# Altium PCB G-BOX_V104a.PcbDoc
Units mil, origin at the board's own origin, x right, y up, seen from the top; angles counter-clockwise.
Board outline 1722.73 x 1998.51 mil, 2 copper layers (Top Layer, Bottom Layer); 76 components, 62 nets, 346 pads, 345 vias.
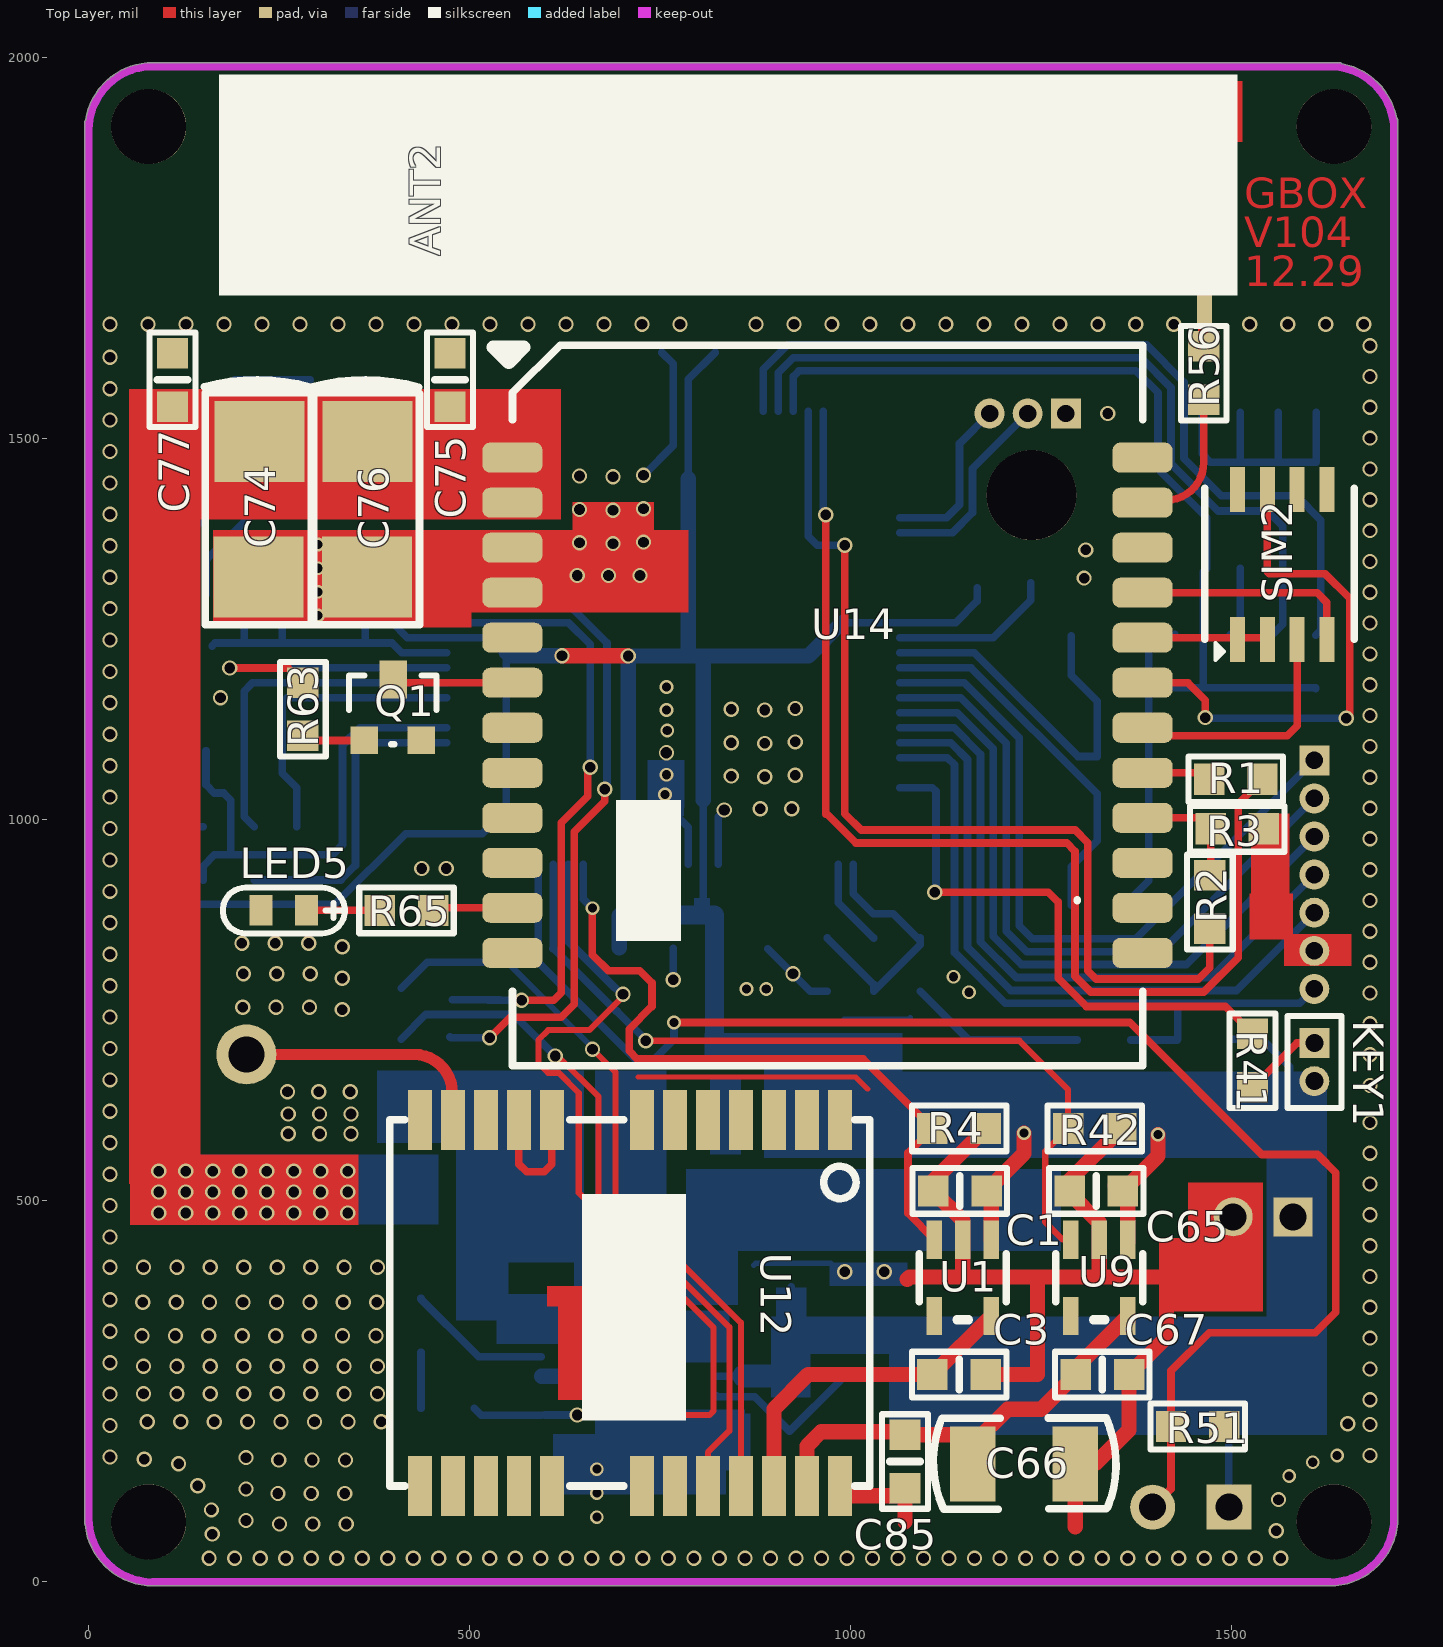
[diagram p0: Top Layer view]
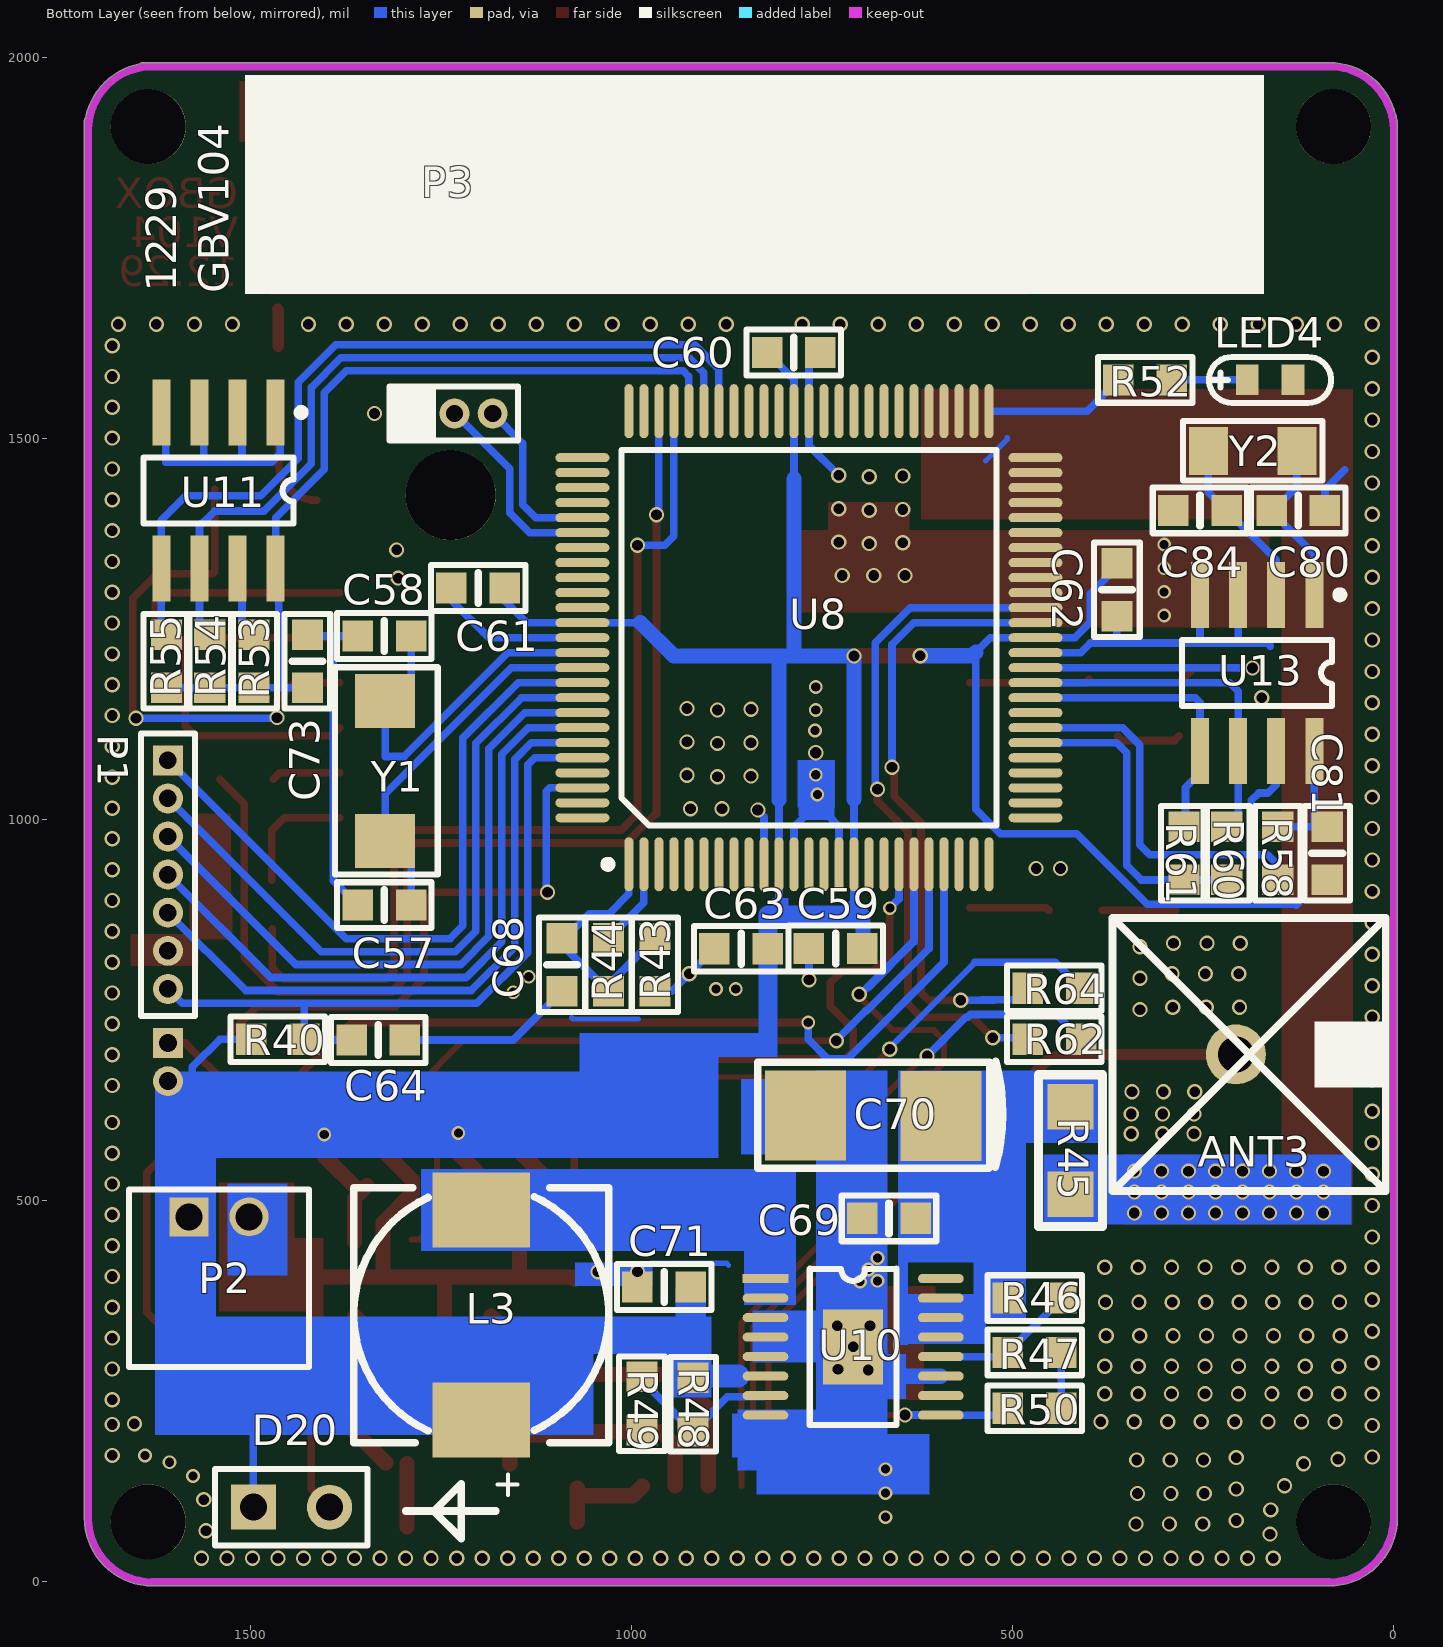
[diagram p1: Bottom Layer view, seen from below]
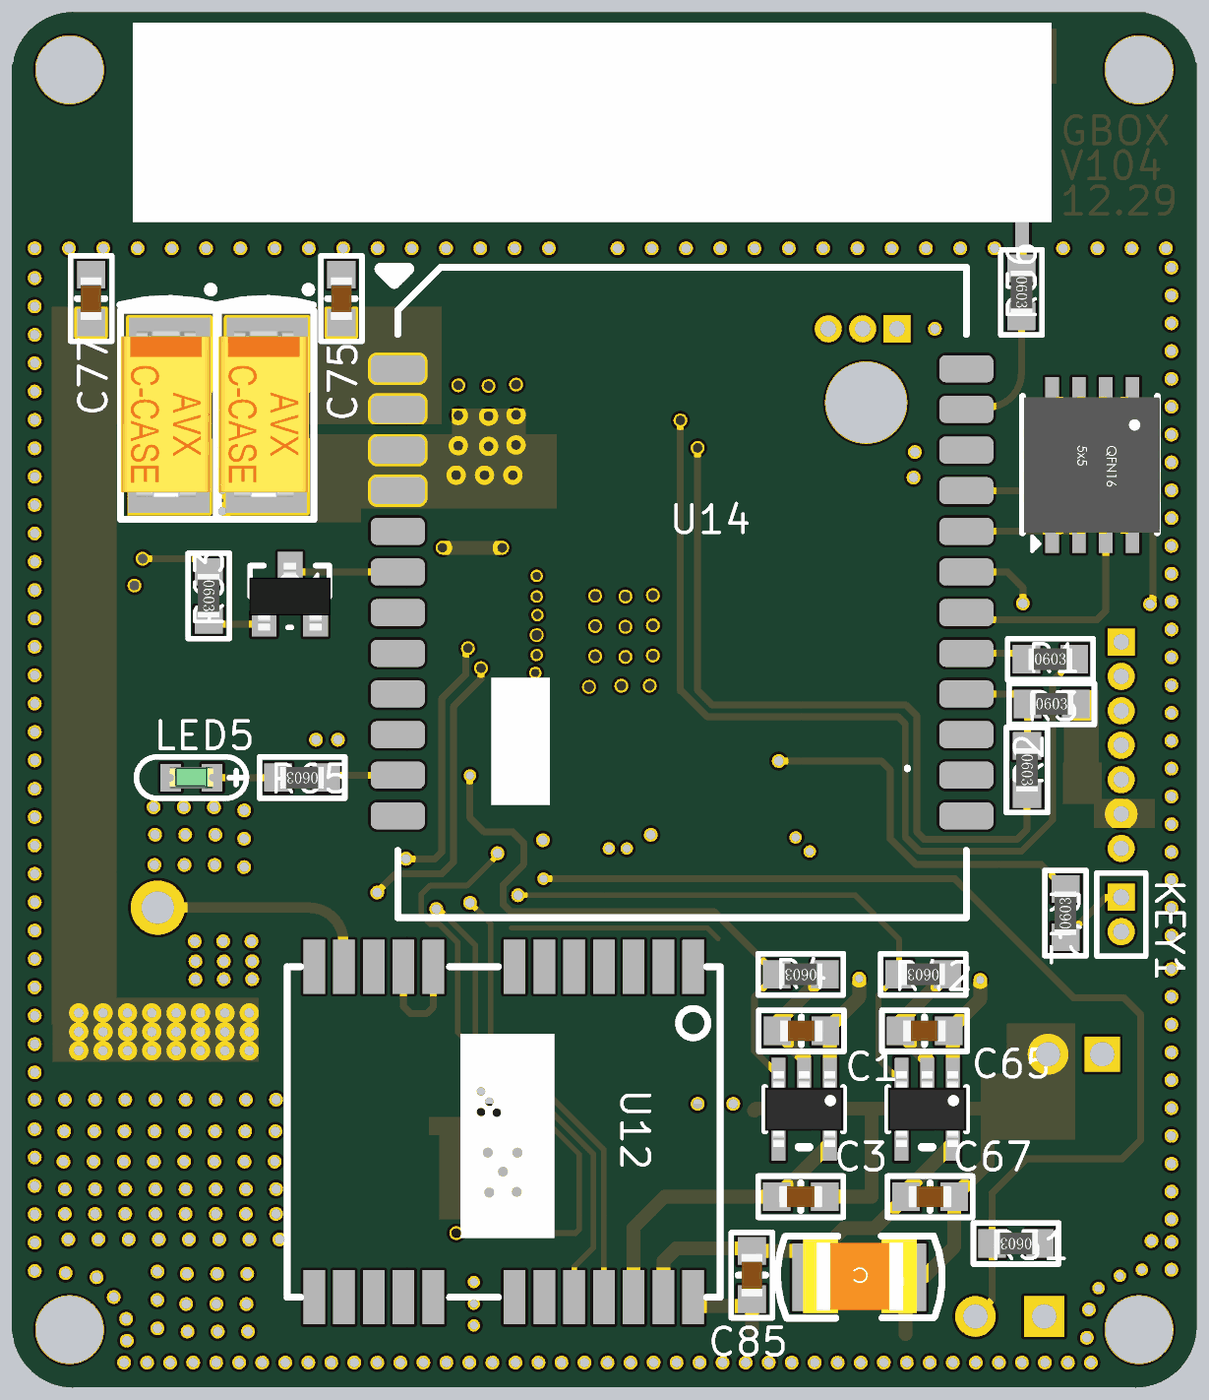
[diagram p2: 3D render of the assembled board from above, using the file's embedded part models]
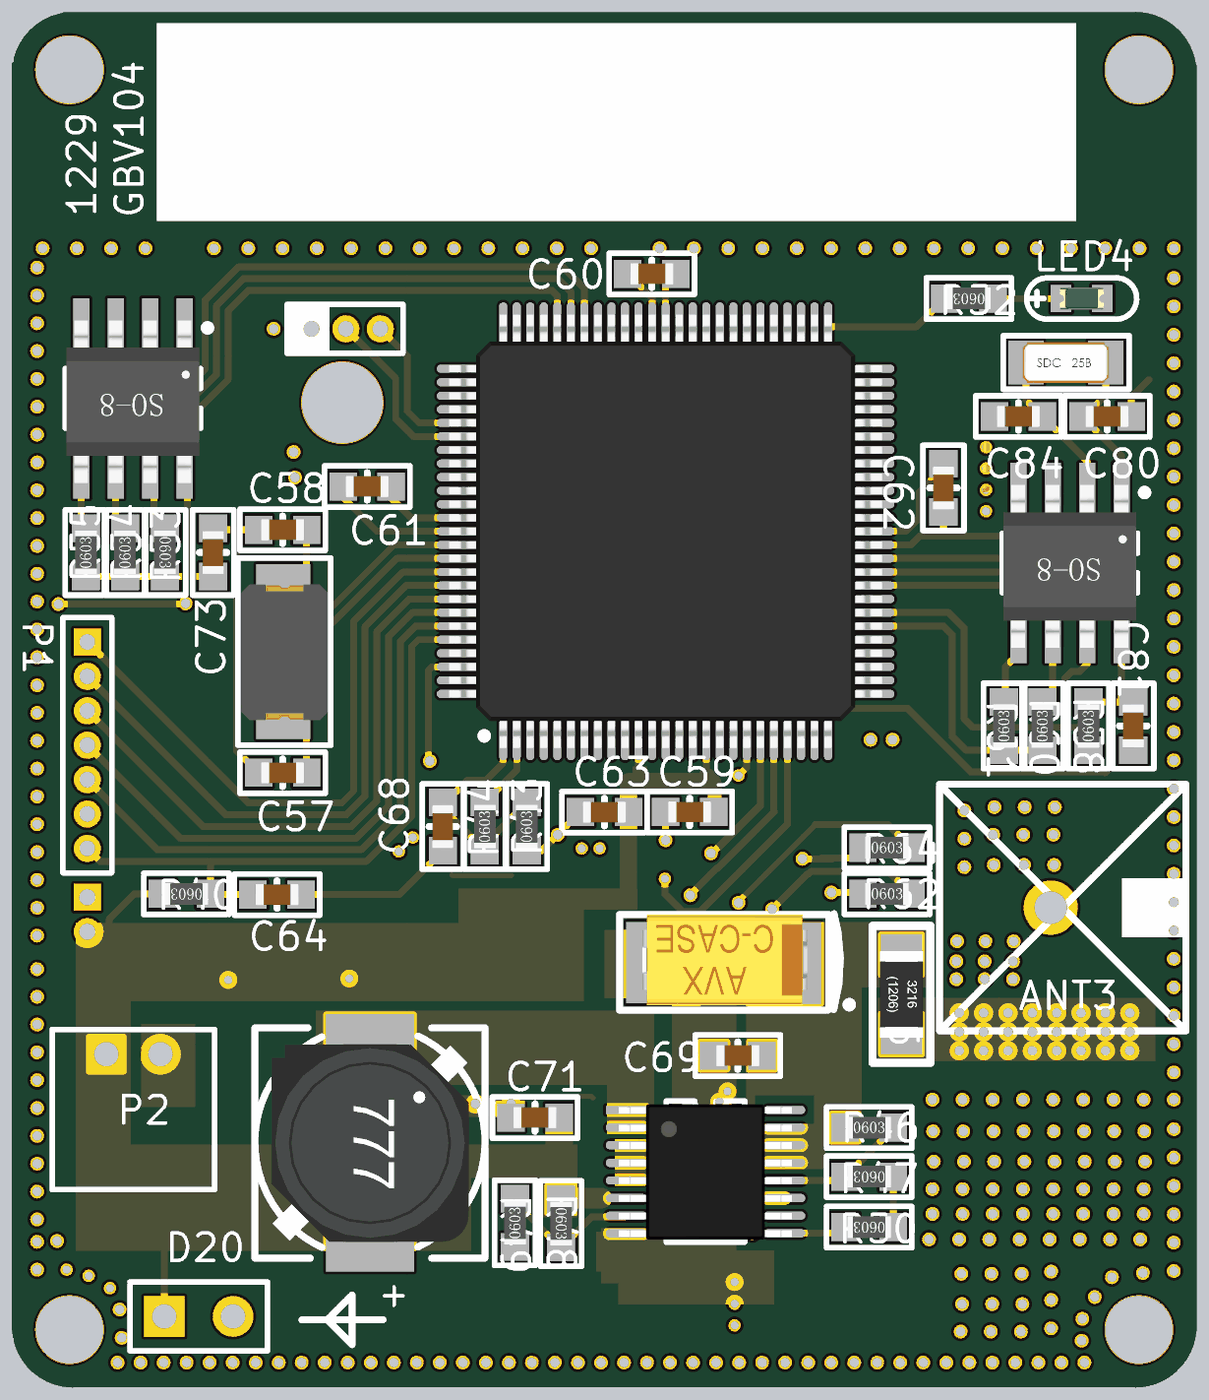
[diagram p3: 3D render of the assembled board from below, using the file's embedded part models]

## Layer stack, top to bottom
Top Solder: solder mask 0.4, Solder Resist, Dk 3.5
Top Layer: signal copper 1.4
Dielectric1: dielectric 12.6, FR-4, Dk 4.8
Bottom Layer: signal copper 1.4
Bottom Solder: solder mask 0.4, Solder Resist, Dk 3.5

## Board outline
-5.01,77 -5.01,1903.1 cw(c-0.1,1904.09) -5.11,1904.09 cw(c84.09,1904.09) -5.01,1908.31 -5.01,1915 cw(c0,1915) -4.03,1917.99 cw(c84.09,1904.09) 84.09,1993.3 cw(c84.09,1988.29) 85.09,1993.2 1628.18,1993.2 cw(c1628.4,1988.19) 1628.4,1993.21 cw(c1628.4,1904) 1629.36,1993.2 1641,1993.2 cw(c1641,1988.19) 1644.54,1991.74 cw(c1628.4,1904) 1716.05,1920.64 cw(c1712.6,1917) 1717.61,1917 1717.61,84 cw(c1628.4,84) 1628.4,-5.21 cw(c1628.4,-0.19) 1627.02,-5.01 85.58,-5.01 cw(c84.19,-0.19) 84.19,-5.21 cw(c84.19,84) -4.55,74.89 cw(c0,77)

## Design rules (kind name [scope] priority, off if disabled: settings)
Clearance Clearance_1 [All] p1: gap=7
Clearance Clearance_2 [All] p2 off: gap=15
HoleSize [All] p1: absolutevalues=TRUE maxlimit=500 minlimit=1 maxpercent=80.000 minpercent=20.000
HoleToHoleClearance [All] p1: gap=0 allowstackedmicrovias=TRUE
MinimumSolderMaskSliver [All] p1: minsoldermaskwidth=0
PolygonConnect PolygonConnect_1 [IsVia vs InNet('GND')] p1: connectstyle=Direct reliefconductorwidth=10 reliefentries=4 polygonreliefangle="90 Angle" airgapwidth=10
PolygonConnect PolygonConnect_2 [All] p2: connectstyle=Relief reliefconductorwidth=10 reliefentries=4 polygonreliefangle="90 Angle" airgapwidth=10
RoutingVias [All] p1: holewidth=28 width=50 viastyle="Through Hole" minholewidth=28 minwidth=50 maxholewidth=28 maxwidth=50
SilkToSilkClearance [All] p1: silktosilkclearance=0
SilkToSolderMaskClearance SilkscreenOverComponentPads [IsPad] p1: minsilkscreentomaskgap=0 clearancetoexposedcopper=TRUE
SolderMaskExpansion [All] p1: expansion=4
Width [All] p1: maxlimit=100 minlimit=7 preferedwidth=10
25 further rules are at their usual default settings.

## Components (designator, comment, footprint, x,y, rotation, side; value= is the part's Value field where it differs from the comment)
ANT2 "GSM_ANT" GSM_ANT 1464,1670 r90 top
ANT3 "ANT" "GPS_ANT_9*9*2 - DUPLICATE" 207,692 r0 bottom
C1 "105" 0603C 1143,513 r0 top
C3 "104" 0603C 1142,272 r0 top
C57 "16pF" 0603C 1324,888 r180 bottom
C58 "16pF" 0603C 1324,1241 r180 bottom
C59 "104" 0603C 732,831 r180 bottom
C60 "104" 0603C 787,1613 r0 bottom
C61 "104" 0603C 1201,1304 r180 bottom
C62 "104" 0603C 363,1301.79 r90 bottom
C63 "104" 0603C 856,830.79 r180 bottom
C64 "104" 0603C 1332,711 r0 bottom
C65 "105" 0603C 1322,513 r0 top
C66 "100uF/10V" CAP1210 1227,155 r90 top
C67 "104" 0603C 1330,272 r0 top
C68 "104" 0603C 1091,809.79 r270 bottom
C69 "107" 0603C 662,477 r0 bottom
C70 "220uF/16V" CAPTANC#1 594,611 r0 bottom
C71 "10u" 0603C 957,387 r180 bottom
C73 "104" 0603C 1425,1208 r270 bottom
C74 "220uF/10V" CAPTANC#2 224,1496 r270 top
C75 "104" 0603C 474,1577 r90 top
C76 "220uF/10V" CAPTANC#2 366,1496 r270 top
C77 "104" 0603C 110,1577 r90 top
C80 "7pF" 0603C 125,1405.79 r0 bottom
C81 "104" 0603C 87,956 r270 bottom
C84 "7pF" 0603C 254,1405.79 r180 bottom
C85 "105" 0603C 1071,158 r270 top
D20 "*" HDR1X2 1496,98 r180 bottom
KEY1 "MHDR1X2" MHDR1X2 1608,707 r270 top
L3 "6.8uH" L-7336 1197,350 r180 bottom
LED4 "LED" LED-0603 157,1577 r180 bottom
LED5 "LED" LED-0603 251,880.92 r180 top
P1 "SIP7" MHDR1X7 1608,1078 r270 bottom
P2 "SIP2" "HDR1X2 2.00" 1541,479 r180 bottom
P3 "CON3" MHDR1*3 1232,1533 r90 bottom
Q1 "NC*" SOT23 399,1144 r0 top
R1 "1K" 0603R 1505,1058 r180 top
R2 "1K" 0603R 1476,892 r90 top
R3 "5.6K" 0603R 1507,993 r180 top
R4 "10K" 0603R 1142,590 r0 top
R40 "100K" 0603R 1464,707 r180 bottom
R41 "100K" 0603R 1522,684 r270 top
R42 "10K" 0603R 1320,590 r0 top
R43 "100K" 0603R 974,809.79 r270 bottom
R44 "200K" 0603R 1035,809.79 r270 bottom
R45 "0R" 1206R 424,566 r270 bottom
R46 "1.4M" 0603R 471,377.36 r0 bottom
R47 "200K" 0603R 471,296.14 r180 bottom
R48 "1M" 0603R 914,233 r90 bottom
R49 "200K" 0603R 991,234 r270 bottom
R50 "10K" 0603R 471,222.79 r180 bottom
R51 "6.8M" 0603R 1455,199 r0 top
R52 "100K" 0603R 326,1572.08 r180 bottom
R53 "100K" 0603R 1490,1208 r90 bottom
R54 "100K" 0603R 1558,1208 r270 bottom
R55 "100K" 0603R 1615,1208 r270 bottom
R56 "0R" 0603R 1468,1586 r90 top
R58 "100K" 0603R 157,956 r270 bottom
R60 "100K" 0603R 224,956 r270 bottom
R61 "100K" 0603R 280,956 r270 bottom
R62 "1K" 0603R 445,717 r0 bottom
R63 "4.7K" 0603R 286,1145 r90 top
R64 "1K" 0603R 445,784 r0 bottom
R65 "10K" 0603R 417,876 r0 top
SIM2 "SIM5*5-8" LGA5*5 1566,1335 r90 top
U1 "BL8555-33PRA" "SOT23-5 LDO" 1146.91,399 r180 top
U8 "MSP430F5438" PQFP100 767,1238.79 r90 bottom locked
U9 "BL8555-30PRA" "SOT23-5 LDO" 1325.91,399 r180 top
U10 "TPS61030" TSOP16 824,397.93 r180 bottom
U11 "AT24C512-1.8" SOP8 1541.64,1427 r270 bottom
U12 "NEO-6M(GPS)" NEO-6M(GPS) 710,366 r90 top locked
U13 "SD1206" SOP8 179,1187.79 r270 bottom
U14 "SIM800E" SIM800E 556,1475 r0 top locked
Y1 "7.3728M" 5032SMD 1323,1064 r270 bottom
Y2 "32.768K" 3215SMD 185,1484 r180 bottom

## Footprints (in the part's own frame and the unit in brackets; to place one, negate y for a bottom-side part, rotate by r counter-clockwise, add the part's x,y. Pads: shape width x height; smd on the part's side, far side on the other; paste and mask are expansions set on the pad)
0603C [mil]
  rect 40x41 smd: 1(-35,0) 2(35,0)
  silkscreen extent -62,-30 62,30, body extent -31,-16 32,16, height 24
0603R [mil]
  rect 40x41 smd: 1(35,5) 2(-35,5)
  silkscreen extent -62,-25 62,35, body extent -31,-11 31,21, height 18
1206R [mil]
  rect 60x60 smd: 1(-57.5,0) 2(57.5,0)
  silkscreen extent -99,-42 100,42, body extent -63,-31 63,31, height 22
3215SMD [mm]
  rect 1.3x1.6 smd: 1(1.473,0) 2(-1.473,0)
  silkscreen extent -2.31,-0.99 2.34,0.99, body extent -1.6,-0.75 1.6,0.75, height 0.81
5032SMD [mm]
  rect 1.8x2 smd: 1(2.328,0) 2(-2.328,0)
  silkscreen extent -3.45,-1.68 3.45,1.75, body extent -2.47,-1.55 2.53,1.65, height 1.35
CAP1210 [mm]
  rect 2.5x1.52 smd: 1(0,1.71) 2(0,-1.71)
  silkscreen extent -1.51,-3.07 1.52,3.02, body extent -1.32,-2.13 1.38,2.07, height 0.95
CAPTANC#1 [mm]
  rect 2.7x3 smd: 1(0,0) 2(4.502,-0.025)
  round 0.5 on Bottom Overlay: ""(-2.388,1.524)
  silkscreen extent -2.06,-1.83 6.1,1.73, body extent -0.84,-1.8 5.26,1.55, height 2.7
CAPTANC#2 [mm]
  rect 2.7x3 smd: 1(0,0) 2(4.502,-0.025)
  round 0.5 on Top Overlay: ""(-2.388,1.524)
  silkscreen extent -2.06,-1.83 6.1,1.73, body extent -0.84,-1.8 5.26,1.55, height 2.7
"GPS_ANT_9*9*2 - DUPLICATE" [mm]
  round 2 hole 1.2: 0(0,0)
  silkscreen extent -4.99,-4.55 4.11,4.55
GSM_ANT [mil]
  rect 39.37x20 smd: 1(0,0)
  Top Layer region: 19,-7.55 49,-7.55 49,984.08 19,984.08
  Top Layer region: 19,-9.92 183,-9.92 183,10.08 19,10.08
  Top Layer region: 219,-49.92 299,-49.92 299,670.08 219,670.08
  Top Layer region: 99,-9.92 184,-9.92 184,885.08 99,885.08
  Top Layer region: 19,945.08 299,945.08 299,985.08 19,985.08
  Top Layer region: 264,625.08 299,625.08 299,985.08 264,985.08
HDR1X2 [mm] "Connector; Header; 2 Position"
  rect 1.5x1.5 hole 0.9: 1(0,0)
  round 1.5 hole 0.9: 2(2.54,0)
  silkscreen extent -1.27,-1.27 3.81,1.27
"HDR1X2 2.00" [mm] "Connector; Header; 2 Position"
  rect 1.3x1.3 hole 0.9: 1(-1,0)
  round 1.3 hole 0.9: 2(1,0)
  silkscreen extent -3,-5 3,0.91
L-7336 [mm]
  rect 3.25x2.5 smd: 1(0,-3.5) 2(0,3.5)
  silkscreen extent -4.25,-4.25 4.25,4.25, body extent -3.64,-3.66 3.65,3.65, height 3.5
LED-0603 [mil]
  rect 30x40 smd: 1(-35,0) 2(25,0)
  silkscreen extent -85,-30 75,30, body extent -37,-16 27,16, height 24
LGA5*5 [mm]
  rect 1.5x0.5 smd: 1(-2.496,1.487) 2(-2.496,0.496) 3(-2.496,-0.496) 4(-2.496,-1.487) 5(2.496,-1.487) 6(2.496,-0.496) 7(2.496,0.496) 8(2.496,1.487)
  silkscreen extent -3.18,-2.4 2.53,2.58, body extent -2.52,-2.51 2.52,2.53, height 0.75
MHDR1*3 [mm]
  rect 1x1 hole 0.58: 1(0,1.27)
  round 1 hole 0.58: 2(0,0) 3(0,-1.27)
  silkscreen extent -0.9,-2.11 0.94,2.17
MHDR1X2 [mm] "Connector; Header; 2 Position"
  rect 1x1 hole 0.6: 1(0,0)
  round 1 hole 0.6: 2(1.27,0)
  silkscreen extent -0.9,-0.9 2.17,0.9
MHDR1X7 [mm] "Connector; Header; 7 Position"
  rect 1x1 hole 0.58: 1(0,0)
  round 1 hole 0.58: 2(1.27,0) 3(2.54,0) 4(3.81,0) 5(5.08,0) 6(6.35,0) 7(7.62,0)
  silkscreen extent -0.9,-0.9 8.52,0.9
NEO-6M(GPS) [mm]
  rect 2x0.8 smd: 1(6.1,-7) 2(6.1,-5.9) 3(6.1,-4.8) 4(6.1,-3.7) 5(6.1,-2.6) 6(6.1,-1.5) 7(6.1,-0.4) 8(6.1,2.6) 9(6.1,3.7) 10(6.1,4.8) 11(6.1,5.9) 12(6.1,7) 13(-6.1,7) 14(-6.1,5.9) 15(-6.1,4.8) 16(-6.1,3.7) 17(-6.1,2.6) 18(-6.1,-0.4) 19(-6.1,-1.5) 20(-6.1,-2.6) 21(-6.1,-3.7) 22(-6.1,-4.8) 23(-6.1,-5.9) 24(-6.1,-7)
  silkscreen extent -6.1,-8 6.1,8
PQFP100 [mm]
  oval 1.8x0.3 smd: 1(-7.55,6) 2(-7.55,5.5) 3(-7.55,5) 4(-7.55,4.5) 5(-7.55,4) 6(-7.55,3.5) 7(-7.55,3) 8(-7.55,2.5) 9(-7.55,2) 10(-7.55,1.5) 11(-7.55,1) 12(-7.55,0.5) 13(-7.55,0) 14(-7.55,-0.5) 15(-7.55,-1) 16(-7.55,-1.5) 17(-7.55,-2) 18(-7.55,-2.5) 19(-7.55,-3) 20(-7.55,-3.5) 21(-7.55,-4) 22(-7.55,-4.5) 23(-7.55,-5) 24(-7.55,-5.5) 25(-7.55,-6) 51(7.55,-6) 52(7.55,-5.5) 53(7.55,-5) 54(7.55,-4.5) 55(7.55,-4) 56(7.55,-3.5) 57(7.55,-3) 58(7.55,-2.5) 59(7.55,-2) 60(7.55,-1.5) 61(7.55,-1) 62(7.55,-0.5) 63(7.55,0) 64(7.55,0.5) 65(7.55,1) 66(7.55,1.5) 67(7.55,2) 68(7.55,2.5) 69(7.55,3) 70(7.55,3.5) 71(7.55,4) 72(7.55,4.5) 73(7.55,5) 74(7.55,5.5) 75(7.55,6)
  oval 0.3x1.8 smd: 26(-6,-7.55) 27(-5.5,-7.55) 28(-5,-7.55) 29(-4.5,-7.55) 30(-4,-7.55) 31(-3.5,-7.55) 32(-3,-7.55) 33(-2.5,-7.55) 34(-2,-7.55) 35(-1.5,-7.55) 36(-1,-7.55) 37(-0.5,-7.55) 38(0,-7.55) 39(0.5,-7.55) 40(1,-7.55) 41(1.5,-7.55) 42(2,-7.55) 43(2.5,-7.55) 44(3,-7.55) 45(3.5,-7.55) 46(4,-7.55) 47(4.5,-7.55) 48(5,-7.55) 49(5.5,-7.55) 50(6,-7.55) 76(6,7.55) 77(5.5,7.55) 78(5,7.55) 79(4.5,7.55) 80(4,7.55) 81(3.5,7.55) 82(3,7.55) 83(2.5,7.55) 84(2,7.55) 85(1.5,7.55) 86(1,7.55) 87(0.5,7.55) 88(0,7.55) 89(-0.5,7.55) 90(-1,7.55) 91(-1.5,7.55) 92(-2,7.55) 93(-2.5,7.55) 94(-3,7.55) 95(-3.5,7.55) 96(-4,7.55) 97(-4.5,7.55) 98(-5,7.55) 99(-5.5,7.55) 100(-6,7.55)
  silkscreen extent -7.67,-6.25 6.25,6.83, body extent -8,-8 8,8, height 1.6
SIM800E [mm]
  rrect50% 2x1 smd: 1(0,0) 2(0,-1.5) 3(0,-3) 4(0,-4.5) 5(0,-6) 6(0,-7.5) 7(0,-9) 8(0,-10.5) 9(0,-12) 10(0,-13.5) 11(0,-15) 12(0,-16.5) 13(21,-16.5) 14(21,-15) 15(21,-13.5) 16(21,-12) 17(21,-10.5) 18(21,-9) 19(21,-7.5) 20(21,-6) 21(21,-4.5) 22(21,-3) 23(21,-1.5) 24(21,0)
  round 3 hole 3: ""(17.3,-1.25)
  Top Layer pour cut-out: 3.454,-11.405 5.613,-11.405 5.613,-16.104 3.454,-16.104
  silkscreen extent -0.64,-20.26 21,3.75
SOP8 [mm]
  rect 2.2x0.6 smd: 1(-2.727,1.905) 2(-2.727,0.635) 3(-2.727,-0.635) 4(-2.727,-1.905) 5(2.473,-1.905) 6(2.473,-0.635) 7(2.473,0.635) 8(2.473,1.905)
  silkscreen extent -2.85,-2.5 0.97,2.88, body extent -3,-2.45 3,2.45, height 1.7
SOT23 [mil]
  rect 36x36 smd: 1(-37.5,-40) 2(37.5,-40)
  rect 36x50 smd: 3(0.5,40)
  silkscreen extent -58,-45 58,45, body extent -59,-49 59,49, height 42
"SOT23-5 LDO" [mil]
  rect 20x50 smd: 1(-37.4,-50) 2(0,-50) 3(37.4,-50) 4(37.4,50) 5(-37.4,50)
  silkscreen extent -57,-31 57,55, body extent -57,-55 57,55, height 57
TSOP16 [mil]
  rect 60x12 smd: 1(0,0)
  oval 60x12 smd: 2(0,-25.59) 3(0,-51.18) 4(0,-76.77) 5(0,-102.36) 6(0,-127.95) 7(0,-153.54) 8(0,-179.13) 9(230,-179.13) 10(230,-153.54) 11(230,-127.95) 12(230,-102.36) 13(230,-76.77) 14(230,-51.18) 15(230,-25.59) 16(230,0)
  rect 78.74x98.43 smd: 11(115,-89.57)
  silkscreen extent 58,-192 172,13, body extent -11,-188 241,8, height 39

## Part data
ANT2: "passive_antenna"
C1 C57 C58 C59 C60 C61 C62 C63 C64 C65 C68 C69 C71 C73 C80 C81 C84 C85: library part CAP
C3 C67: library part 0603C
C66: library part EC, "Electrolytic Capacitor"
C70 C74 C76: library part CAP2, "极性电容"
C75 C77: library part CAP, "Capacitor"
D20: library part 光敏二极管, "Photosensitive Diode"
KEY1: "Header, 2-Pin"
L3: library part L
LED4 LED5: library part LED3, "BLUE LED"
P1: library part COM7
P2: library part 2PIN
P3: "Connector"
Q1: library part NPN_1
R1 R2 R3 R40 R41 R43 R44 R46 R47 R48 R49 R51 R52 R53 R54 R55 R56 R58 R60 R61 R65: library part RES2A
R4 R42 R50: library part Res2, "Resistor"
R45: library part 0805R
R62 R63 R64: library part 0603R
SIM2: library part SIM_LGA5×5-
U1: library part BL8555
U8: library part MSP430F5438A
U9: library part BL8555, "BL8555-33PRA"
U12: library part NEO
U13: library part PCF8593
Y1: library part CRYSTAL0.3
Y2: library part CRYSTAL_2P

## Free pads (board coordinates)
  round 98.43 hole 98.43: 0(78.74,78.74) 0(78.74,1909.45) 0(1633.86,78.74) 0(1633.86,1909.45)

## Via types
v1: diameter 20, hole 14, Top Layer to Bottom Layer, 316 vias
v2: diameter 18, hole 12, Top Layer to Bottom Layer, 27 vias
v3: diameter 20, hole 15, Top Layer to Bottom Layer, 2 vias

## Nets (pads, with @x,y where several pads share a name; then routed paths per layer and width w, separated by ;. In a path a pad name is that pad's centre, name@x,y a point inside that pad or via, vN(x,y) a via of type N, cw(c..) or ccw(c..) an arc to the next point about the centre after c; other vN are vias at no path point)
EEP_SCL: R54.2 U8.70 U11.6 | length 1018.5
  Bottom Layer w10: U8.70 904.8,1586.59 924.21,1606 1381.04,1606 1420,1567.04 1420,1467.04 1482.04,1405 1546.79,1405 1566.64,1385.16 U11.6 1566.64,1256.72 R54.2@1552.79,1242.87
EEP_SDA: R55.2 U8.69 U11.5 | length 1107.4
  Bottom Layer w10: U8.69 885.11,1590.95 917.16,1623 1388.08,1623 1437,1574.08 1437,1474.08 1486.08,1425 1584.79,1425 1616.64,1393.16 U11.5 1616.64,1248.64 R55.2@1610,1242
EEP_WP: C73.2 R53.2 R54.1 R55.1 U8.71 U11.8 | length 1139.8
  Bottom Layer w10: U8.71 924.48,1581.48 932,1589 1374,1589 1403,1560 1403,1460 1466.64,1396.36 U11.8 1462.5,1325.5 1462.5,1174.5 1464,1173 ; C73.2 1464,1173 ; R55.1 R54.1 R53.2 1464,1173
EXRTC_INT: R58.1 U8.32 U13.7 | length 646.3
  Bottom Layer w10: R58.1@150.13,920.79 150.13,939.13 165,954 186.5,954 186.5,1025.5 177,1035 165,1035 154,1046 U13.7 ; 187,954 320,954 333,967 333,1098.04 355.64,1120.68 U8.32
EXRTC_SCL: R60.2 U8.35 U13.6 | length 453.5
  Bottom Layer w10: R60.2@217,991 204,1004 U13.6 204,1168.79 214.94,1179.74 U8.35
EXRTC_SDA: R61.2 U8.34 U13.5 | length 389
  Bottom Layer w10: R61.2@273,991 273,1042 254,1061 U13.5 254,1153.79 260.26,1160.05 U8.34
GND: C1.1 C3.2 C57.1 C58.1 C59.1 C60.1 C61.1 C62.1 C63.1 C64.1 C65.1 C66.2 C67.2 C68.2 C69.2 C70.2 C71.1 C73.1 C74.2 C75.2 C76.2 C77.2 C80.1 C81.2 C84.1 C85.2 LED4.2 LED5.2 P1.6 P2.2 P3.1 Q1.2 R3.2 R4.1 R42.1 R43.1 R47.1 R49.1 R50.1 R51.1 SIM2.5 U1.2 U8.10 U8.12 U8.15 U8.37 U8.63 U8.88 U9.2 U10.3 U10.4 U10.5 U10.8 U10.11 U11.1 U11.2 U11.3 U11.4 U12.7 U12.10 U12.12 U12.13 U12.24 U13.3 U13.4 U14.3 U14.4 U14.22 U14.24 | length 4733.4
  Top Layer w7: 721,662.5 1006.27,662.5 1022,646.77
  Top Layer w20: U12.24 998.43,113 C85.2@1071,113 ; 1071,79 C85.2@1071,113 ; C85.2 C85.2@1071,113 ; 1074,397 1077,400 1146.91,400 ; C3.2 1245,272 1245,400 ; R4.1 1108,526 C1.1 1146.91,474.09 U1.2 1146.91,400 ; C65.1@1287,510 1325.91,471.09 U9.2 1325.91,402.91 1323,400 ; C65.1 1287,527 R42.1 ; 1294.32,72.32 C66.2 ; C66.2@1322.32,156.45 1365,199.13 C67.2 1414,321 1414,400 ; P2.2 1501.63,425.63 1476,400 1414,400 ; 1146.91,400 1245,400 ; 1245,400 1323,400 ; 1323,400 1414,400
  Bottom Layer w7: 507,1501 507,1499 535,1471 ; 872.5,415.5 875,418 974,418 978,414 ; 991,738.5 1076.5,738.5 1078,740
  Bottom Layer w10: 64,1459 90,1433 C80.1 ; 162,1228 165.79,1231.79 207,1231.79 ; U13.3 204,1234.79 207,1231.79 ; 254,1234.79 U13.4 ; 363,1233.79 C62.1 ; R50.1 R47.1 ; U8.37 410.68,1219.11 398,1231.79 207,1231.79 ; U8.15 727.63,991.42 740.68,1004.48 772.32,1004.48 786.68,990.11 U8.12 ; v1(728,1452) 767,1491 U8.63 767,1598 C60.1 ; v1(767,790) C59.1 ; U8.10 826.06,1003.79 834,1011.74 v3(834,1012.79) ; C63.1 947,774.79 R43.1 ; U8.88 1186.79,1238.79 1236,1288 C61.1 C61.1@1236,1311 ; C68.2 1154.79,711 C64.1 ; C57.1 1391,920 1391,1238 ; C58.1 1423,1241 C73.1 ; U11.1@1460.79,1534.36 1460.79,1480 1471.79,1469 1609.79,1469 ; 1510.79,1471 U11.2@1510.79,1534.36 ; 1560.79,1470 U11.3@1560.79,1534.36 ; 1610.79,1469 U11.4@1610.79,1534.36
  Bottom Layer w20: U10.11@594,269.97 660.03,269.97
  other v1: 158,31 191.48,31 224.95,31 258.43,31 291.9,31 325.38,31 358.86,31 392.33,31 425.81,31 459.28,31 492.76,31 526.24,31 559.71,31 593.19,31 626.67,31 660.14,31 693.62,31 727.09,31 760.57,31 794.05,31 827.52,31 861,31 894.47,31 927.95,31 961.43,31 994.9,31 1028.38,31 1061.85,31 1095.33,31 1128.81,31 1162.28,31 1195.76,31 1229.24,31 1262.71,31 1296.19,31 1329.66,31 1363.14,31 1396.62,31 1430.09,31 1463.57,31 1497.04,31 1530.52,31 1564,31 162,62.75 1558,67 250.25,76 294.12,76 338,76 206.38,80.67 161,94.5 1561,108 248.25,116 292.12,116 336,116 206.38,121.89 143,126.25 118,155 249.25,160 293.12,160 337,160 73,161 206.38,163.11 28,164 1681,166 28,205.22 1681,206.44 1652,207.56 76.88,210 120.75,210 164.62,210 208.5,210 252.38,210 296.25,210 340.12,210 384,210 1681,239 28,246.44 71.88,247 115.75,247 159.62,247 203.5,247 247.38,247 291.25,247 335.12,247 379,247 689,278 729,279 1681,279.44 71.88,283 115.75,283 159.62,283 203.5,283 247.38,283 291.25,283 335.12,283 379,283 28,287.67 709,308.36 1681,319.89 69.88,323 113.75,323 157.62,323 201.5,323 245.38,323 289.25,323 333.12,323 377,323 28,328.89 687,336 730,336 1681,360.33 70.88,367 114.75,367 158.62,367 202.5,367 246.38,367 290.25,367 334.12,367 378,367 28,370.11 1681,400.78 992,407 1043.78,407 28,413 71.88,413 115.75,413 159.62,413 203.5,413 247.38,413 291.25,413 335.12,413 379,413 1681,441.22 28,452.56 1681,481.67 28,493.78 1681,522.11 28,535 1681,562.56 28,576.22 261.78,588 303,588 344.22,588 1681,602.67 261.78,614 303,614 344.22,614 28,617.44 260.78,643 302,643 343.22,643 1681,651.33 28,658.67 1681,691.78 28,699.89 1681,732.22 28,741.11 332.62,750.89 202,754 245.88,754 289.75,754 1681,772.67 28,782.33 332.62,792.11 203,798 246.88,798 290.75,798 924,797.79 1681,813.11 28,823.56 332.62,833.33 201,838 244.88,838 288.75,838 1681,853.55 28,864.78 1681,894 28,906 1681,934.44 437,936 469,936 28,947.22 1681,974.89 28,988.44 881.11,1014.38 922.33,1014.38 1681,1015 28,1029.67 887,1056.25 1681,1055.78 843,1057.25 927,1058.25 28,1070.89 1681,1096.22 887,1100.12 843,1101.12 927,1102.12 28,1112.11 1681,1136.67 887,1144 843,1145 927,1146 28,1153.33 173,1160 1681,1177.11 28,1194.55 1681,1217.55 28,1235.78 1681,1258 28,1277 1681,1298.44 1306,1317 28,1318.22 640.89,1320.38 682.11,1320.38 723.33,1320.38 1681,1338.89 1308,1354 28,1359.44 688,1362.25 644,1363.25 728,1364.25 1681,1379.33 28,1400.67 688,1406.12 644,1407.12 728,1408.12 1681,1419.78 28,1441.89 688,1450 644,1451 1681,1460.22 28,1483.11 1681,1500.67 28,1524.33 1337,1533 1681,1541.11 28,1565.55 1681,1581.55 28,1606.78 1681,1622 28,1650 77.85,1650 127.7,1650 177.55,1650 227.39,1650 277.24,1650 327.09,1650 376.94,1650 426.79,1650 476.64,1650 526.48,1650 576.33,1650 626.18,1650 676.03,1650 725.88,1650 775.73,1650 875.42,1650 925.27,1650 975.12,1650 1024.97,1650 1074.82,1650 1124.66,1650 1174.51,1650 1224.36,1650 1274.21,1650 1324.06,1650 1373.91,1650 1423.76,1650 1523.45,1650 1573.3,1650 1623.15,1650 1673,1650
  other v2: 666.69,85 666.69,116.5 1575,139 666.69,148 1606,157 1638,166 700,394 677,395 689,410 677,425 1155,773.56 863,778 889,778 1134.56,794 756,1033 758,1059 759,1117 758,1144 758,1174 301,1268 301,1299 301,1330 301,1361
  other v3: 758,1088
GPS_EN: R42.2 U8.21 U9.3 | length 1094
  Top Layer w8: v1(731,710) 1221,710 1285,646 R42.2 1255,565 1255,472 1278,449 U9.3
  Bottom Layer w10: U8.21 609.52,831.52 609,831 609.89,831 691.89,749 693.11,749 v1@732.11,710
GPS_EN2: R4.2 U1.3 U8.19 | length 932.2
  Top Layer w10: v2(660.89,884) 660.89,823.11 682,802 723,802 739,786 739,755 709,725 709,696.89 719.89,686 1016,686 R4.2 1075,563 1075,483.51 U1.3
  Bottom Layer w10: U8.19 648.89,896 v2(660.89,884)
GPS_INT: U12.3
GPS_RX: R64.1 U8.39 | length 837.4
  Top Layer w10: v1(568,763) 610.04,763 620,772.96 620,995.85 655,1030.85 655,1066 v1(658,1069)
  Bottom Layer w10: U8.39 629.52,1258.48 658,1230 v1(658,1069) ; R64.1@477,764 540,764 541,763 ; 524,763 541,763 ; v1(568,763) 541,763
GPS_TX: R62.1 U8.40 | length 902.8
  Top Layer w10: v1(526,714) 553,741 620,741 637,758 637,984 677,1024 v1(677,1039.96)
  Bottom Layer w10: U8.40 633.88,1278.16 680,1232.04 680,1042.96 v1(677,1039.96) ; R62.1@474,715 475,714 v1(526,714)
GSM_EN: R50.2 U8.20 U10.9 | length 1331.2
  Top Layer w8: v1(641,219) 814.67,219 820,224.33 820,333.57 643,510.57 643,641.47 616.47,668 602.89,668 590,680.89 590,711 603,724 657,724 v1@701,768
  Top Layer w10: v1@701,768 v1(701,771)
  Bottom Layer w10: R50.2 515,218.79 U10.9 ; U10.9@598.21,219 v1(641,219) ; U8.20 629.2,841.32 ; 689.5,779.5 629.2,839.8 629.2,841.32 ; v1(701,771) 699.53,771 629.2,841.32
GSM_RXD: R2.1 R3.1 U14.16 | length 158.3
  Top Layer w10: U14.16 1455.44,1002.56 R3.1@1470,988 ; R2.1@1472,921 R3.1@1472,986
GSM_TXD: R1.1 U14.17 | length 90.8
  Top Layer w10: U14.17 1461.39,1061.61 R1.1
KEY: R41.2 U8.98 | length 734.9
  Top Layer w10: v1(1110,905) 1259,905 1272,892 1272,792 1309,755 1491,755 R41.2
  Bottom Layer w10: U8.98 1106.85,1041.94 1111.68,1037.12 1111.68,906.68 v1(1110,905)
NetANT2_1: ANT2.1 R56.1 | length 49.4
  Top Layer w15: R56.1 1463,1669 ANT2.1
NetC3_1: C3.1 U1.5 U12.22 | length 437
  Top Layer w20: U12.22 898.98,227 943.98,272 C3.1 1107.32,272 U1.5
NetC57_2: C57.2 U8.90 Y1.1 | length 487.3
  Bottom Layer w10: U8.90 1157.53,1199.42 1323,1033.96 Y1.1 1289,938.34 C57.2
NetC58_2: C58.2 U8.89 Y1.2 | length 487.2
  Bottom Layer w10: U8.89 1161.89,1219.11 1298,1083 1323,1083 Y1.2 1289,1189.66 C58.2
NetC68_1: C68.1 R43.2 R44.1 U8.1 | length 341.1
  Bottom Layer w10: R43.2 1030,783.79 R44.1 1091,835.79 C68.1 1087.47,844.79 1055.47,876.79 1029.21,876.79 1003.22,902.78 U8.1
NetC69_1: C69.1 C70.1 R45.1 R46.1 U10.13 U10.14 U10.15 | length 88
  Bottom Layer w10: R46.1@506.02,372.34 U10.15
NetC80_2: C80.2 U13.1 Y2.1 | length 237.2
  Bottom Layer w10: U13.1 104,1348.1 160,1404.1 127,1437.1 Y2.1 ; Y2.1@123.01,1484 Y2.1@123.01,1495.53
NetC84_2: C84.2 U13.2 Y2.2 | length 247.5
  Bottom Layer w10: U13.2 154,1340.79 C84.2@213,1399.79 ; C84.2@216,1408.79 213,1405.79 C84.2@213,1399.79 ; Y2.2 243,1429.79 C84.2 C84.2@213,1399.79 ; Y2.2@248.99,1484 Y2.2@248.99,1495.53
NetD20_2: D20.2 R51.2 U8.22 | length 1961.4
  Top Layer w10: v2(768,734) 1366,734 1539.22,560.78 1612.22,560.78 1636,537 1636,354 1609,327 1470,327 1420,277 R51.2 1420,122 D20.2
  Bottom Layer w10: U8.22 589.83,813.17 717,686 742,686 768,712 v2(768,734)
NetKEY1_1: KEY1.1 R41.1 | length 107.9
  Top Layer w10: R41.1@1524,648 R41.1@1526,650 ; R41.1 1585,707 KEY1.1
NetL3_2: L3.2 U10.1 U10.2
NetLED4_1: LED4.1 R52.1 | length 98.9
  Bottom Layer w10: LED4.1 R52.1@290.92,1577
NetLED5_1: LED5.1 R65.2 | length 96
  Top Layer w10: LED5.1 286.08,881 R65.2
NETLIGHT: R65.1 U14.11 | length 105.4
  Top Layer w10: R65.1 455.45,884.45 U14.11
NetQ1_1: Q1.1 R63.2 | length 88.5
  Top Layer w10: R63.2 287,1104 Q1.1 Q1.1@361.5,1109.5
NetQ1_3: Q1.3 U14.6 | length 158.3
  Top Layer w10: Q1.3 403.78,1179.72 U14.6
NetR44_2: R44.2 U8.2 | length 116
  Bottom Layer w10: U8.2 983.54,891.26 R44.2
NetR46_2: R46.2 R47.2 U10.12 | length 190.5
  Bottom Layer w10: R46.2 436,371.14 R47.2 511.58,295.57 U10.12
NetR48_2: R48.2 R49.2 U10.7 | length 213.5
  Bottom Layer w10: U10.7 825.41,242.97 874.03,242.97 R48.2 919.97,198 986,264.03 R49.2
NetR52_2: R52.2 U8.51 | length 186.8
  Bottom Layer w10: R52.2 402.04,1536.04 U8.51
NetR53_1: R53.1 U11.7 | length 87.9
  Bottom Layer w10: R53.1@1497.33,1242 R53.1@1502.79,1247.46 ; R53.1@1510.79,1249.46 U11.7@1510.79,1329.64
NetR56_2: R56.2 U14.23 | length 160.5
  Top Layer w10: U14.23@1413,1419 ccw(c1413,1469) 1463,1469 R56.2
NetR62_2: R62.2 U12.20 | length 910.8
  Top Layer w8: v1(612,690) 615.68,690 669,636.68 669,505.79 840.67,334.12 840.67,198.31 812.36,170 U12.20
  Bottom Layer w10: R62.2 442.5,744.5 555.39,744.5 558.89,741 561,741 v1(612,690)
NetR64_2: R64.2 U12.21 | length 967.3
  Top Layer w8: v1(661,699) 691,669 691,505 855.67,340.33 U12.21
  Bottom Layer w8: 549.11,813 661,701.11 v1(661,699)
  Bottom Layer w10: R64.2 444,813 549.11,813
NetU12_8: U12.8 U12.9 | length 167.8
  Top Layer w10: U12.9 564.33,548.33 574.66,538 597.71,538 607.64,547.93 U12.8
PC_RX: P3.3 U8.80 | length 221.4
  Bottom Layer w10: U8.80 1125.47,1396.27 1142.53,1413.34 1142.53,1493.53 P3.3
PC_TX: P3.2 U8.81 | length 266.4
  Bottom Layer w10: U8.81 1133.32,1376.59 1159.53,1402.79 1159.53,1460.53 P3.2
PULL_UP: R60.1 R61.1 U8.31 | length 414
  Bottom Layer w10: R60.1@217,921 R60.1 R61.1 331,921 350,940 350,1088 363,1101 U8.31
PWRKEY: R63.1 U8.36 | length 388.8
  Top Layer w10: v1(185,1199) 262,1199 R63.1
  Bottom Layer w10: v1(185,1199) 185.42,1199.42 U8.36
RF_IN: ANT3.0 U12.11 | length 299.4
  Top Layer w15: ANT3.0@207,694 209,692 427,692 cw(c427,642) U12.11@477,642
RST: C64.2 P1.7 R40.1 U8.96 | length 939.2
  Bottom Layer w10: U8.96 1126.69,1081.31 1136,1072 1136,825.79 1202.79,759 1430,759 ; C64.2 1428,711 R40.1 1429,758 1430,759 ; P1.7 1589,759 1430,759
SIM_CLK: SIM2.1 SIM2.2 U14.20 | length 167
  Top Layer w10: U14.20 1538.46,1238.78 SIM2.2@1546.49,1230.75
SIM_DATA: SIM2.7 U14.19 | length 689.6
  Top Layer w10: U14.19 1442.28,1179.72 1465,1157 v1@1465,1135 ; SIM2.7 1546.49,1325.34 1549,1322.83 1622.05,1322.83 1654.37,1290.51 1654.37,1134.37 v1(1650,1133)
  Bottom Layer w10: v1@1465,1133 v1(1650,1133)
  other v1: 1465,1134
SIM_RST: SIM2.3 U14.18 | length 326.2
  Top Layer w10: U14.18 1393.44,1110 1572.35,1110 1585.51,1123.16 SIM2.3
SIM_VDD: SIM2.4 U14.21 | length 295.3
  Top Layer w10: U14.21 1611.69,1297.83 1624.53,1285 SIM2.4
TCK: P1.5 U8.95 | length 864.8
  Bottom Layer w10: U8.95 1131.04,1101 1153,1079.04 1153,832.83 1209.83,776 1506,776 P1.5
TDI: P1.3 U8.93 | length 894.4
  Bottom Layer w10: U8.93 1139.76,1140.37 1187,1093.12 1187,846.92 1223.92,810 1440,810 P1.3
TDO: P1.2 U8.92 | length 909.2
  Bottom Layer w10: U8.92 1144.11,1160.05 1204,1100.17 1204,853.96 1230.96,827 1407,827 P1.2
TEST: P1.1 U8.91 | length 924
  Bottom Layer w10: U8.91 1148.47,1179.74 1221,1107.21 1221,861 1238,844 1374,844 P1.1
TMS: P1.4 U8.94 | length 879.6
  Bottom Layer w10: U8.94 1135.4,1120.68 1170,1086.08 1170,839.88 1216.88,793 1473,793 P1.4
UCA2RXD: R1.2 U8.73 | length 1534.8
  Top Layer w10: 967,1007 967,1008.96 ; v1(967,1400) 967,1008.96 ; R1.2 1508,1021 1508,818.96 1463.04,774 1314.96,774 1294,794.96 1294,958.5 1283,969.5 1006.46,969.5 967,1008.96
  Bottom Layer w10: U8.73 963.85,1398.15 965.7,1400 v1(967,1400)
UCA2TXD: R2.2 U8.72 | length 1293.4
  Top Layer w10: v1(992,1360) 992,1008 1013.5,986.5 1294.5,986.5 1311,970 1311,802 1322,791 1456,791 1471,806 R2.2
  Bottom Layer w10: U8.72 944.17,1371.83 956,1360 v1(992,1360)
V3.0_GPS: C66.1 C67.1 C85.1 U9.5 U12.23 | length 566.1
  Top Layer w20: U12.23 942.28,178.28 961,197 C85.1@1062,197 ; C85.1 1151.13,193 1161.57,182.57 1205.5,226.5 1249.5,226.5 C67.1 1295,280.68 U9.5 U9.5@1363.32,340.68 ; C66.1 C66.1@1159.68,162.18
VBAT: C1.2 C59.2 C60.2 C61.2 C62.2 C63.2 C65.2 C71.2 C81.1 D20.1 KEY1.2 L3.1 P2.1 R40.2 R48.1 R58.2 U1.1 U8.11 U8.16 U8.38 U8.64 U8.87 U9.1 U10.6 U13.8 | length 4130.4
  Top Layer w20: v1(621,1215) 707.74,1215 v1(707.94,1214.79) ; U1.1 1184.32,506.68 C1.2 1227,562 v2(1227,589) ; C65.2@1347,520 1363.32,503.68 U9.1 U9.1@1363.32,446 ; C65.2 1403,559 v2(1403,587)
  Bottom Layer w10: C81.1@90.69,988.79 C81.1@91.69,987.79 ; C81.1@93.69,989.76 93.69,990.79 C81.1@104,990.79 ; U13.8 C81.1@104,990.79 ; R58.2@150.13,990.79 122,990.79 ; C62.2 363,1331.29 398,1296.29 398,1258.79 418,1238.79 U8.38 528.96,1238.79 547.96,1219.79 547.96,1013.58 516.19,981.81 415.85,981.81 323.04,889 128.53,889 127.53,888 119.5,896.03 119.5,988.29 122,990.79 ; 707.94,886 U8.16 707.94,1026.79 ; 786.68,1447.48 U8.64 786.68,1577.69 C60.2 ; 806.37,876.63 U8.11 806.37,1025.79 ; U10.6 860,269.97 ; R48.1@917.03,269.97 R48.1 919,306.79 ; 922,309.79 C71.2 ; 988,1258.48 U8.87 1137.48,1258.48 1166,1287 C61.2 ; 992,332 994,330 ; D20.1 1496,226 1511,241 ; R40.2 1539.63,712 1576,675.63 1576,658 1577,657 KEY1.2 ; C81.1@104,990.79 122,990.79
  Bottom Layer w20: 547.96,1219.79 552.75,1215 v1(621,1215) ; C59.2@696,832 696,874.06 706,874.06 ; 696.94,875 707.94,886 ; 707.94,1026.79 v1(707.94,1214.79) 786.68,1214.79 786.68,1447.48 ; 791,1214.79 806.37,1214.79 ; 806.37,1025.79 806.37,1214.79 ; 988,1258.48 944.32,1214.79 806.37,1214.79 ; 1481,249 1484,252
  Bottom Layer w25: 706,874.06 706.94,875 821,875 C63.2 821,720
  Bottom Layer w30: 860,269.97 R48.1@917.03,269.97
VCC_GSM: C74.1 C75.1 C76.1 C77.1 R45.2 U14.1 U14.2
  other v1: 92,484 127.43,484 162.86,484 198.29,484 233.71,484 269.14,484 304.57,484 340,484 92,511.5 127.43,511.5 162.86,511.5 198.29,511.5 233.71,511.5 269.14,511.5 304.57,511.5 340,511.5 92,539 127.43,539 162.86,539 198.29,539 233.71,539 269.14,539 304.57,539 340,539
VDD_EXT: U14.5
pads on no net: C70. C74. C76. SIM2.6 SIM2.8 U1.4 U8.3 U8.4 U8.5 U8.6 U8.7 U8.8 U8.9 U8.13 U8.14 U8.17 U8.18 U8.23 U8.24 U8.25 U8.26 U8.27 U8.28 U8.29 U8.30 U8.33 U8.41 U8.42 U8.43 U8.44 U8.45 U8.46 U8.47 U8.48 U8.49 U8.50 U8.52 U8.53 U8.54 U8.55 U8.56 U8.57 U8.58 U8.59 U8.60 U8.61 U8.62 U8.65 U8.66 U8.67 U8.68 U8.74 U8.75 U8.76 U8.77 U8.78 U8.79 U8.82 U8.83 U8.84 U8.85 U8.86 U8.97 U8.99 U8.100 U9.4 U10.10 U10.16 U12.1 U12.2 U12.4 U12.5 U12.6 U12.14 U12.15 U12.16 U12.17 U12.18 U12.19 U14. U14.7 U14.8 U14.9 U14.10 U14.12 U14.13 U14.14 U14.15

## Keep-outs
Keep-Out Layer:
  lines w10: -0.1,1904.09 cw(c84.09,1904.09) 84.09,1988.29 ; 0,77 0,1904.09 ; 0,84 ccw(c84.19,84) 84.19,-0.19 ; 82,1988.19 336.81,1988.19 1641,1988.19 ; 84.19,0 1628.4,0 ; 1628.4,-0.19 ccw(c1628.4,84) 1712.6,84 1712.6,1917 ; 1628.4,1988.19 cw(c1628.4,1904) 1712.6,1904

## Other copper
Top Layer:
  rectangle net GND: 635,1366 742,1417
  rectangle net GND: 682.11,1272 787,1380
  rectangle net GND: 1404,355 1541,451
  rectangle net GND: 601,361.5 742,388
  rectangle net GND: 616,239 688,365
  rectangle net GND: 1442,425 1541,524
  rectangle net GND: 1568,808 1657,850
  rectangle net GND: 1523,843 1580,903
  rectangle net GND: 662,238.5 756,365
  rectangle net VCC_GSM: 53,1394 620,1565
  rectangle net VCC_GSM: 53,522 147,1563
  rectangle net VCC_GSM: 54,468 354,561
  rectangle net GND: 163,1272 618,1380
  rectangle net GND: 602,1272 698,1380
  rectangle net GND: 163,1252.11 502.39,1285
  rectangle net GND: 1525,896 1575.5,1008
  pour cut-out: -6,1992 1718,1992 1718,1860 1718,1851 1717,1659 1717,1654 -6,1657 -6,1663
  text "GBOX" at 1516,1802 h40
  text "V104" at 1516,1751 h40
  text "12.29" at 1516,1700 h40
Bottom Layer:
  rectangle net GND: 815,560.5 856,660
  rectangle net GND: 727,146 861,226
  rectangle net GND: 972,388 1074,419
  rectangle net GND: 1451,402 1530,523
  rectangle net GND: 733,1016 782,1078.5
  rectangle net GND: 609,115 836,194.29
  rectangle net GND: 799,163 868,221
  rectangle net VBAT: 1545,310 1625,607
  rectangle net GND: 639.5,240 708,299
  rectangle net GND: 664,115 758,290
  rectangle net NetL3_2: 784,363 852,542
  rectangle net NetL3_2: 784,434 1276,542
  rectangle net VBAT: 895,299 1050,348
  rectangle net VBAT: 895,242 947,299
  rectangle net VBAT: 1050,193 1625,348
  rectangle net NetC69_1: 535,312 645,378
  rectangle net NetC69_1: 482,343 551,671
  rectangle net NetC69_1: 544,419 644,576
  rectangle net NetC69_1: 637,311 650,671
  rectangle net GND: 664,242 758,671
  rectangle net NetC69_1: 378,576 644,671
  rectangle net VCC_GSM: 55,469 459,561
  rectangle net GND: 725,288 841,356
  rectangle net VBAT: 886,556 1625,670
  rectangle net VBAT: 886,616 1068,720
  rectangle net VBAT: 808,689 943,720
  rectangle net VBAT: 794,876.63 815,897
  rectangle net GND: 733.44,1005 781,1060
  rectangle net VBAT: 902,340 942,386
  pour cut-out: -5,1990 -5,1658 -6,1657 1718,1657 1718,1994

## Silkscreen, mask and mechanical layers (free items; w line width, h text height)
Top Overlay:
  rectangle: 647,212 784,509
  rectangle: 171,1688 1507,1978
  lines w10: 1297,893.79 1297,894.79
Bottom Overlay:
  rectangle: 170,1690 1507,1977
  lines w5: 1149,128 1176,128 ; 1162,114 1162,141
  lines w10: 1178,93 1296,93 ; 1223,57 1223,129 1259,93 1223,57
  text "1229" at 1597,1693 h40 r270
  text "GBV104" at 1528,1691 h40 r270